# Altium PCB PCB_LDOC.PcbDoc
Units mm, origin at the board's own origin, x right, y up, seen from the top; angles counter-clockwise.
Board outline 30 x 13 mm, 2 copper layers (Top Layer, Bottom Layer); 5 components, 3 nets, 17 pads, 5 vias.
Unrouted connection lines stored in the file: 3.
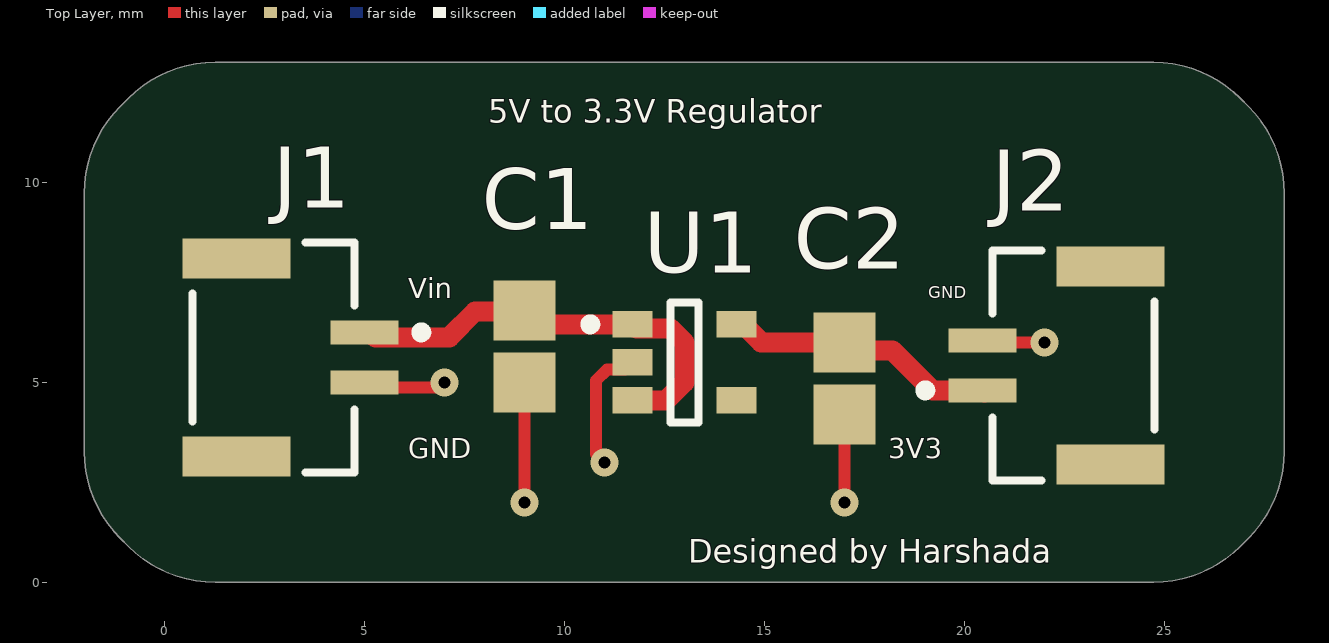
[diagram p0: Top Layer view]
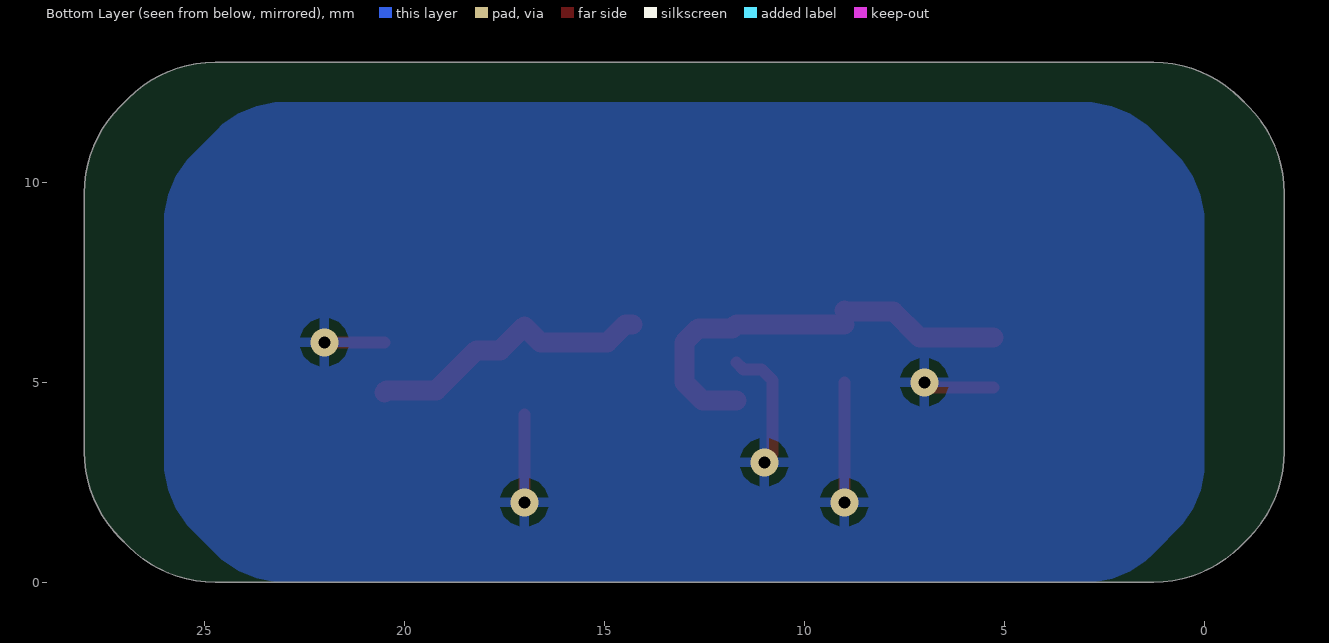
[diagram p1: Bottom Layer view, seen from below]
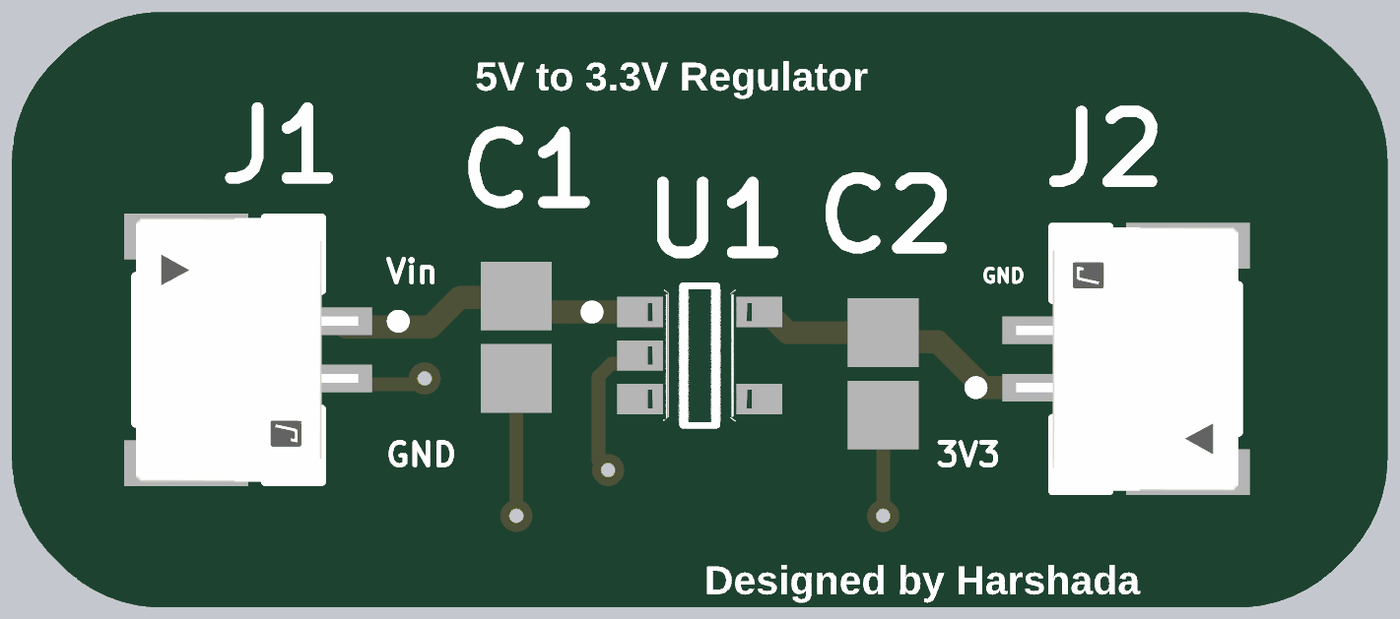
[diagram p2: 3D render of the assembled board from above, using the file's embedded part models]

## Layer stack, top to bottom
Top Solder: solder mask 0.0102, Solder Resist, Dk 3.5
Top Layer: signal copper 0.0356
Dielectric 1: dielectric 0.32, FR-4, Dk 4.8
Bottom Layer: signal copper 0.0356
Bottom Solder: solder mask 0.0102, Solder Resist, Dk 3.5

## Board outline
-1.102,1.102 -0.898,0.898 ccw(c1.27,3.066) 1.27,0 24.73,0 ccw(c24.73,3.066) 26.898,0.898 27.102,1.102 ccw(c24.934,3.27) 28,3.27 28,9.73 ccw(c24.934,9.73) 27.102,11.898 26.898,12.102 ccw(c24.73,9.934) 24.73,13 1.27,13 ccw(c1.27,9.934) -0.898,12.102 -1.102,11.898 ccw(c1.066,9.73) -2,9.73 -2,3.27 ccw(c1.066,3.27)

## Design rules (kind name [scope] priority, off if disabled: settings)
Clearance [All] p1: gap=0.254 ignorepadtopadclearanceinfootprint=FALSE
PolygonConnect [All] p1: connectstyle=Relief reliefconductorwidth=0.254 reliefentries=4 polygonreliefangle="90 Angle" airgapwidth=0.254
RoutingVias [All] p1: holewidth=0.711 width=1.27 viastyle="Through Hole" minholewidth=0.711 minwidth=1.27 maxholewidth=0.711 maxwidth=1.27
SolderMaskExpansion [All] p1: expansion=0 istentingtop=FALSE
SupplyNets "Schematic Supply Nets_3" [InNet('+5V')] p1: voltage=0.000
SupplyNets "Schematic Supply Nets_2" [InNet('+3V3')] p2: voltage=0.000
SupplyNets "Schematic Supply Nets" [InNet('GND')] p3: voltage=0.000
Width [All] p1: maxlimit=0.5 minlimit=0.254 preferedwidth=0.3
30 further rules are at their usual default settings.

## Components (designator, comment, footprint, x,y, rotation, side; value= is the part's Value field where it differs from the comment)
C1 "1u" CAPC2013X145X50ML20T25 9,5.9 r270 top
C2 "1u" CAPC2013X145X50ML20T25 17,5.1 r270 top
J1 "SM02B-GHS-TB(LF)(SN)" FP-SM02B-GHS-TB_LF_SN-MFG 2.725,5.625 r270 top
J2 "SM02B-GHS-TB(LF)(SN)" FP-SM02B-GHS-TB_LF_SN-MFG 22.725,5.425 r90 top
U1 "MIC5317-3.3YM5-TR" FP-SOT23-5LD-PL-1-MFG 13,5.5 r0 top

## Footprints (in the part's own frame and the unit in brackets; to place one, negate y for a bottom-side part, rotate by r counter-clockwise, add the part's x,y. Pads: shape width x height; smd on the part's side, far side on the other; paste and mask are expansions set on the pad)
CAPC2013X145X50ML20T25 [mm] "Chip Capacitor, 2-Leads, Body 2.00x1.25mm, IPC Low Density"
  rect 1.5x1.55 smd: 1(-0.9,0) 2(0.9,0)
  body extent -1.1,-0.72 1.1,0.72, height 1.45
FP-SM02B-GHS-TB_LF_SN-MFG [mm]
  rect 0.6x1.7 smd paste+0 mask+0: 1(-0.625,2.275) 2(0.625,2.275)
  rect 1x2.7 smd paste+0 mask+0: 3(-2.475,-0.925) 4(2.475,-0.925)
  silkscreen extent -2.88,-2.02 2.88,3.83, body extent -3.08,-2.37 3.08,3.22, height 0.25
FP-SOT23-5LD-PL-1-MFG [mm]
  rect 1x0.66 smd paste+0 mask+0: 1(-1.3,0.95) 2(-1.3,0) 3(-1.3,-0.95) 4(1.3,-0.95) 5(1.3,0.95)
  silkscreen extent -2.47,-1.5 0.35,1.5, body extent -1.9,-1.6 1.9,1.6, height 0.25

## Part data
C1 C2: library part CMP-2007-01152-1, Manufacturer=Kemet, Part Number=C0805C105K8RALTU
J1 J2: library part CMP-2000-07076-2, "CONN HEADER SMD R/A 2POS 1.25MM", Color=Natural, Current Rating=1A, Package Quantity=2500, Voltage Rating=50V, Connector Type="Outer Shroud Contact", Contact Material=Bronze, Contact Plating=Tin, Contact Type="Male Pin", Fastening Type=Latch, Housing Color=Natural, Housing Material=Nylon, Lead Free="Lead Free", Mount="Surface Mount", Number of Contacts=2, Number of Positions=2, Number of Rows=1, Orientation="Right Angle", Packaging="Tape and Reel", Pitch=0.049inch, Series=GH, Termination=Solder
U1: library part CMP-06324-000116-1, "IC REG LINEAR 3.3V 150MA SOT23-5", Case/Package=SOT-23-5, Dropout Voltage=155mV, Max Input Voltage=6V, Max Operating Temperature=125°C, Min Current Limit=200mA, Min Input Voltage=2.5V, Min Operating Temperature=-40°C, Output Current=150mA, Output Voltage=3.3V, Package Quantity=3000, Power Supply Rejection Ratio (PSRR)=70dB, Mount="Surface Mount", Number of Outputs=1, Number of Regulators=1, Packaging="Tape and Reel", RoHS Compliant=No, Series=-

## Via types
v1: diameter 0.7, hole 0.3, Top Layer to Bottom Layer, 5 vias

## Nets (pads, with @x,y where several pads share a name; then routed paths per layer and width w, separated by ;. In a path a pad name is that pad's centre, name@x,y a point inside that pad or via, vN(x,y) a via of type N, cw(c..) or ccw(c..) an arc to the next point about the centre after c; other vN are vias at no path point)
+3V3: C2.1 J2.1 U1.5 | length 7.2
  Top Layer w0.5: U1.5 14.47,6.45 14.92,6 16.6,6 17,6.4 17.6,5.8 18.2,5.8 19.2,4.8 J2.1 J2.1@20.5,4.75
+5V: C1.1 J1.1 U1.1 U1.3 | length 10.7
  Top Layer w0.5: J1.1@5.275,6.125 7.125,6.125 7.768,6.768 8.968,6.768 C1.1 ; C1.1@9,6.45 U1.1 11.8,6.35 12.65,6.35 13,6 13,5 12.55,4.55 U1.3
GND: C1.2 C2.2 J1.2 J2.2 U1.2 | length 11.7
  Top Layer w0.3: J1.2@5.275,4.875 6.875,4.875 v1(7,5) ; v1(9,2) C1.2 ; v1(11,3) 10.796,3.204 10.796,5.047 11.069,5.32 11.52,5.32 U1.2 ; v1(17,2) C2.2 ; J2.2@20.5,6 v1(22,6)
pads on no net: J1.3 J1.4 J2.3 J2.4 U1.4

## Polygon pours and split planes (outlines as drawn)
GND on Bottom Layer "GND_L02_P013" (solid, pour order 13): 0,8.948 cw(c2.54,8.948) 0.744,10.744 1.256,11.256 cw(c3.052,9.46) 3.052,12 23,12 cw(c23,9.586) 24.707,11.293 25.256,10.744 cw(c23.46,8.948) 26,8.948 26,3.052 cw(c23.46,3.052) 25.256,1.256 24.744,0.744 cw(c22.948,2.54) 22.948,0 3,0 cw(c3,2.414) 1.293,0.707 0.707,1.293 cw(c2.414,3) 0,3

## Silkscreen, mask and mechanical layers (free items; w line width, h text height)
Top Overlay:
  text "5V to 3.3V Regulator" at 8.1,11.289 h1
  text "Vin" at 6.1,7.1 h0.5
  text "GND" at 19.1,7.1 h0.3
  text "GND" at 6.1,3.1 h0.5
  text "3V3" at 18.1,3.1 h0.5
  text "Designed by Harshada" at 13.1,0.289 h1
Mechanical 1:
  lines w0.254: -2,3.27 ccw(c1.066,3.27) -1.102,1.102 -0.898,0.898 ccw(c1.27,3.066) 1.27,0 7,0 24.73,0 ccw(c24.73,3.066) 26.898,0.898 27.102,1.102 ccw(c24.934,3.27) 28,3.27 28,9.73 ccw(c24.934,9.73) 27.102,11.898 26.898,12.102 ccw(c24.73,9.934) 24.73,13 1.27,13 ccw(c1.27,9.934) -0.898,12.102 -1.102,11.898 ccw(c1.066,9.73) -2,9.73 -2,3.27